# EAGLE board 2relay_2copy (EAGLE 6.6.0)
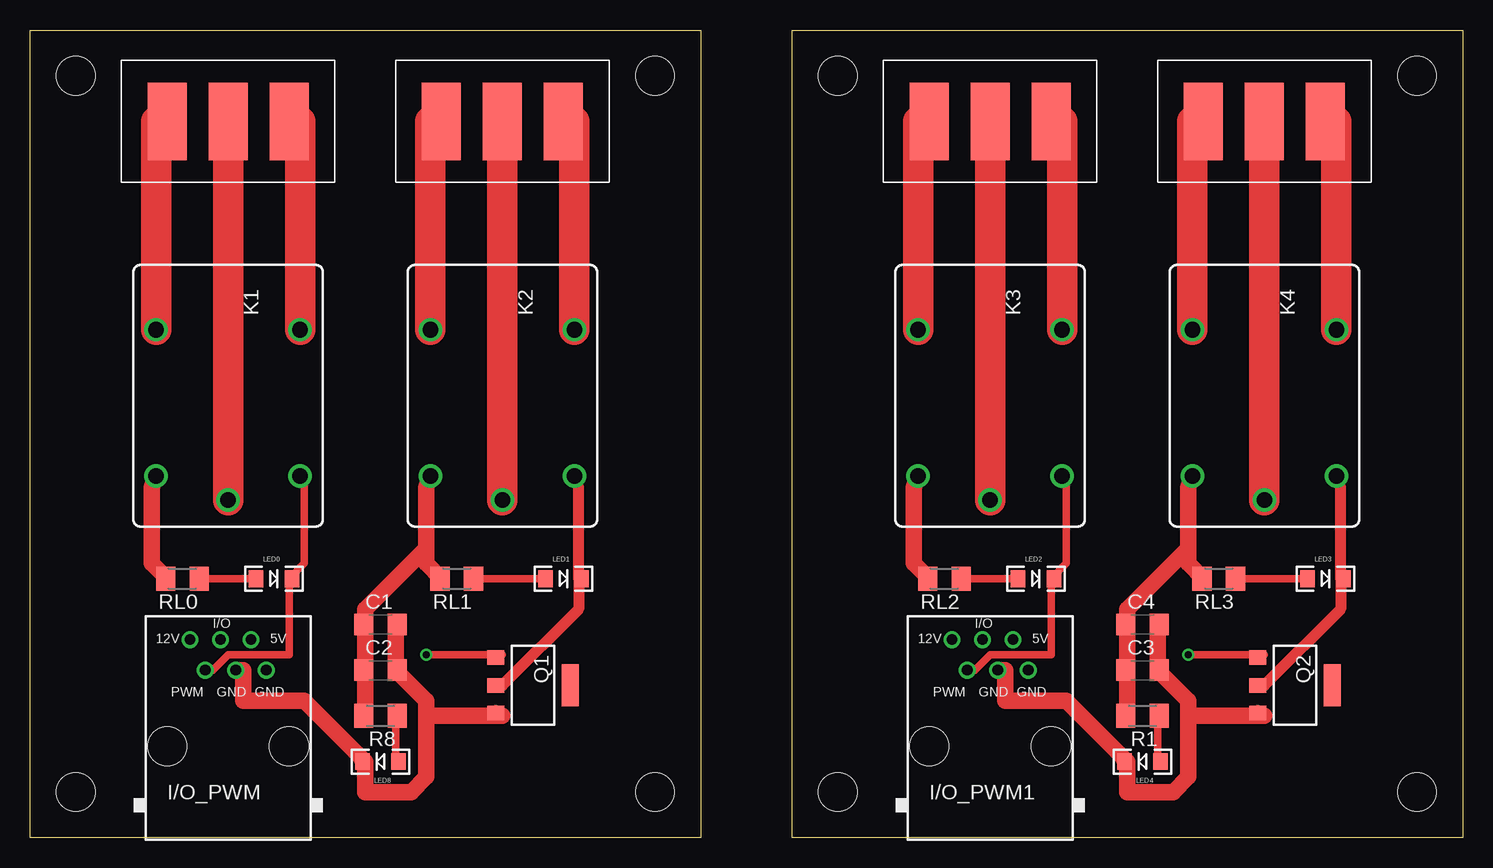
[diagram p0: board, top side]
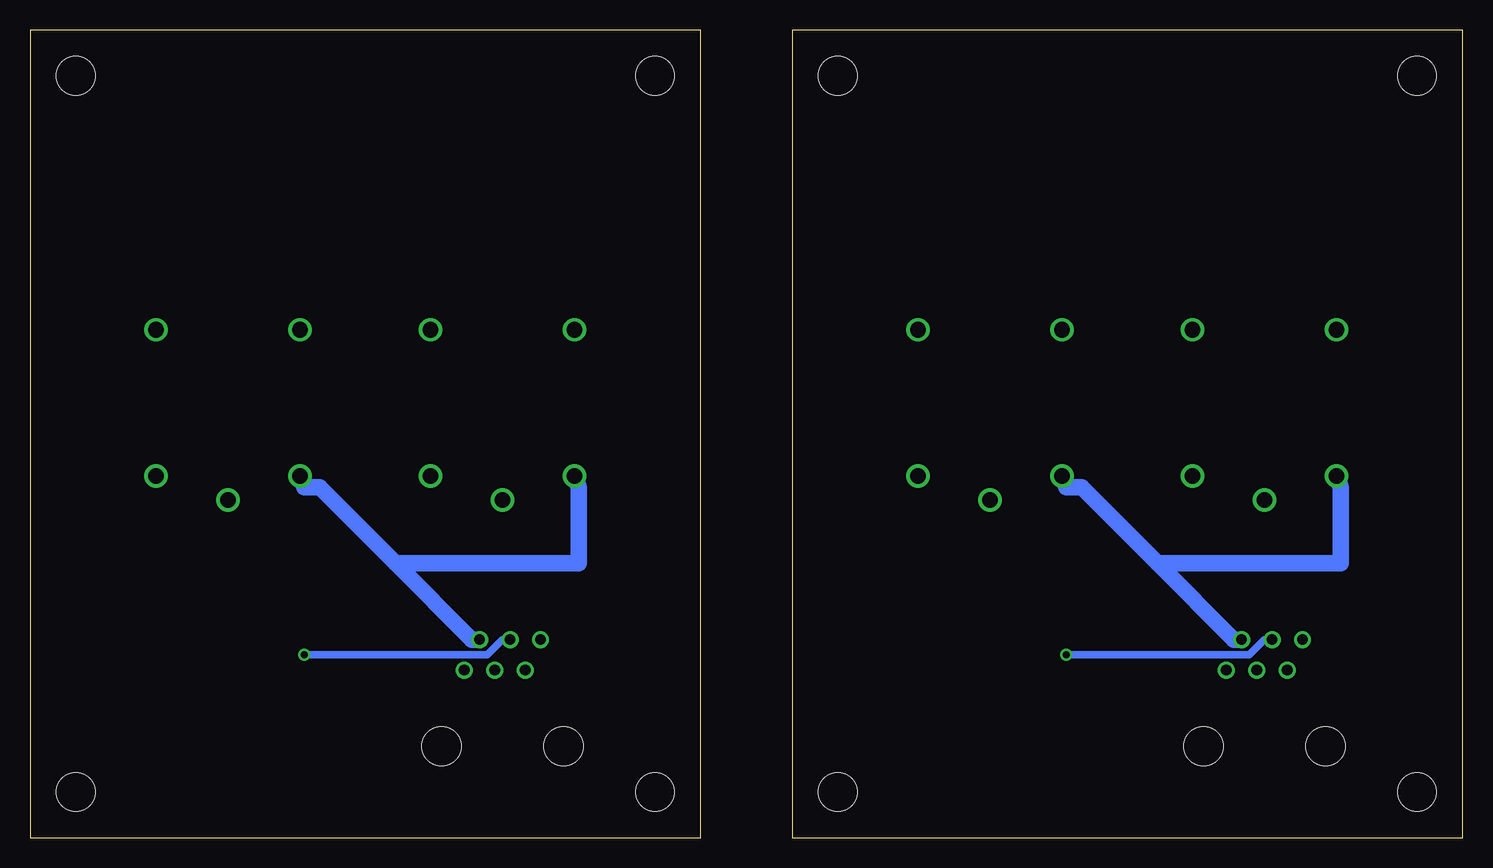
[diagram p1: board, bottom side, seen from below]

Size 119.38 x 67.31 mm. Coordinates in mm from the lower left corner, seen from the top.
Outline: 0,67.31 55.88,67.31 55.88,0 0,0 0,67.31
Outline: 63.5,67.31 119.38,67.31 119.38,0 63.5,0 63.5,67.31
Copper layers (1*16): Top 0.035mm / dielectric 1.5mm / Bottom 0.035mm
Design rules "default": minimum track width 10mil, minimum drill 24mil, track to track 8mil, track to pad 8mil, pad to pad 8mil, via to via 8mil, smd to smd 8mil, copper to edge 40mil, drill to drill 8mil, minimum pad ring 10mil, minimum via ring 8mil, stop-mask expansion 4mil, vias tented up to drill 0mil, thermal gap 10mil
Net classes: 0 default: width 0.61 mm; 1 power: width 0.914 mm; 2 highpower: width 1.372 mm
Holes 3.2 mm at 3.81,63.5 3.81,3.81 52.07,3.81 52.07,63.5 67.31,63.5 67.31,3.81 115.57,3.81 115.57,63.5
tRestrict: area 0,30.5 to 55.9,63.5; area 35.6,24.1 to 43.2,31.8; area 12.7,24.1 to 20.3,31.8; area 63.5,30.5 to 119.4,63.5; area 99.1,24.1 to 106.7,31.8; area 76.2,24.1 to 83.8,31.8
bRestrict: area 0,30.5 to 55.9,63.5; area 12.7,24.1 to 20.3,31.8; area 35.6,24.1 to 43.2,31.8; area 63.5,30.5 to 119.4,63.5; area 76.2,24.1 to 83.8,31.8; area 99.1,24.1 to 106.7,31.8
Milling: 8 lines

## Footprints (pad centres in the part's own frame; a part is rotated, then mirrored left to right if it is on the bottom)
C1206 = smd 1.6 x 1.8: 1 -1.4,0; 2 1.4,0
RJ12-STRAIGHT = drill 0.9 pad 1.4: +5V 1.905,8.89; +12V -3.175,8.89; GND1 3.175,6.35; GND2 0.635,6.35; I/O -0.635,8.89; PWM -1.905,6.35 | hole 3.251: -5.08,0; 5.08,0
JS-M = drill 1.3: 1 6.7,6; 2 6.7,-6; C 8.7,0; NC -5.5,-6; NO -5.5,6
LED-1206 = smd 1.2 x 1.4: A -1.5,0; C 1.5,0
PG-SOT-223 = smd 1.2 x 1.4: 1 -2.311,-3.099; 2 0,-3.099; 3 2.311,-3.099 | smd 3.5 x 1.4: 4 0,3.099
M1206 = smd 1.6 x 2: 1 -1.4,0; 2 1.4,0
3-PIN-5.08S = smd 3.251 x 6.452: 1 -5.08,0; 2 0,0; 3 5.08,0

## Placement (x,y rotation side)
C1  10uF  [C1206]  29.21,17.78 0 top
C2  100nF  [C1206]  29.21,13.97 0 top
C3  100nF  [C1206]  92.71,13.97 0 top
C4  10uF  [C1206]  92.71,17.78 0 top
I/O_PWM  I2C 1  [RJ12-STRAIGHT]  16.51,7.62 0 top
I/O_PWM1  I2C 1  [RJ12-STRAIGHT]  80.01,7.62 0 top
K1  JS-M1-9V-5  [JS-M]  16.51,36.83 270 top
K2  JS-M1-9V-5  [JS-M]  39.37,36.83 270 top
K3  JS-M1-9V-5  [JS-M]  80.01,36.83 270 top
K4  JS-M1-9V-5  [JS-M]  102.87,36.83 270 top
LED0  [LED-1206]  20.32,21.59 0 top
LED1  [LED-1206]  44.45,21.59 0 top
LED2  [LED-1206]  83.82,21.59 0 top
LED3  [LED-1206]  107.95,21.59 0 top
LED4  [LED-1206]  92.71,6.35 180 top
LED8  [LED-1206]  29.21,6.35 180 top
Q1  BSP75  [PG-SOT-223]  41.91,12.7 270 top
Q2  BSP75  [PG-SOT-223]  105.41,12.7 270 top
R1  1K  [M1206]  92.71,10.16 180 top
R8  1K  [M1206]  29.21,10.16 180 top
RL0  1K  [M1206]  12.7,21.59 180 top
RL1  1K  [M1206]  35.56,21.59 180 top
RL2  1K  [M1206]  76.2,21.59 180 top
RL3  1K  [M1206]  99.06,21.59 180 top
X1  22-23-20315.08S  [3-PIN-5.08S]  39.37,59.69 180 top
X2  22-23-20315.08S  [3-PIN-5.08S]  16.51,59.69 180 top
X3  22-23-20315.08S  [3-PIN-5.08S]  102.87,59.69 180 top
X4  22-23-20315.08S  [3-PIN-5.08S]  80.01,59.69 180 top

## Library data of the parts
C1-C4 = rcl
I/O_PWM I/O_PWM1 X1-X4 = lpatiny
K1-K4 = relay; OC_FARNELL: unknown; OC_NEWARK: unknown
LED0 LED1-LED4 LED8 = SparkFun
Q1 Q2 = infineon; OC_FARNELL: unknown; OC_NEWARK: unknown
R1 R8 RL0 RL1-RL3 = resistor

## Nets
+5V [highpower]: C1.1 C2.1 I/O_PWM.+5V K1.2 K2.2 R8.2 RL0.2 RL1.2
+5V1 [highpower]: C3.1 C4.1 I/O_PWM1.+5V K3.2 K4.2 R1.2 RL2.2 RL3.2
GND [highpower]: C1.2 C2.2 I/O_PWM.GND2 LED8.C Q1.3
GND1 [highpower]: C3.2 C4.2 I/O_PWM1.GND2 LED4.C Q2.3
I/O: I/O_PWM.I/O Q1.1
I/O1: I/O_PWM1.I/O Q2.1
N$1 [power]: K2.1 LED1.C Q1.2
N$2: LED0.A RL0.1
N$3 [power]: K4.1 LED3.C Q2.2
N$4: LED1.A RL1.1
N$5 [highpower]: K2.C X1.2
N$6 [highpower]: K1.NC X2.3
N$7 [highpower]: K2.NC X1.3
N$8: LED2.A RL2.1
N$9: LED3.A RL3.1
N$10: LED4.A R1.1
N$11 [highpower]: K4.NO X3.1
N$12 [highpower]: K3.NO X4.1
N$13 [highpower]: K3.NC X4.3
N$14 [highpower]: K2.NO X1.1
N$15 [highpower]: K4.NC X3.3
N$16 [highpower]: K4.C X3.2
N$19 [highpower]: K1.NO X2.1
N$23: LED8.A R8.1
POWER1 [highpower]: K1.C X2.2
POWER2 [highpower]: K3.C X4.2
PWM: I/O_PWM.PWM K1.1 LED0.C
PWM1: I/O_PWM1.PWM K3.1 LED2.C

## Tracks (layer width: path | path; a pad name or v marks a point on that pad's centre or on a via)
+5V
  Top 1.372: RL0.2 11.43,21.59 10.16,22.86 10.16,29.21 K1.2 | 27.94,17.78 27.94,13.97 | 27.94,13.97 27.94,10.16 R8.2 | 27.94,13.97 C2.1 | 33.02,24.13 33.02,29.21 K2.2 | 33.02,24.13 33.02,22.86 34.29,21.59 RL1.2 | 27.94,17.78 27.94,19.05 33.02,24.13 | 27.94,17.78 C1.1
  Bottom 1.372: 25.4,22.86 31.75,29.21 33.02,29.21 K2.2 | 25.4,22.86 19.05,16.51 I/O_PWM.+5V | 25.4,22.86 10.16,22.86 10.16,29.21 K1.2
+5V1
  Top 1.372: RL2.2 74.93,21.59 73.66,22.86 73.66,29.21 K3.2 | 91.44,17.78 91.44,13.97 | 91.44,13.97 91.44,10.16 R1.2 | 91.44,13.97 C3.1 | 96.52,24.13 96.52,29.21 K4.2 | 96.52,24.13 96.52,22.86 97.79,21.59 RL3.2 | 91.44,17.78 91.44,19.05 96.52,24.13 | 91.44,17.78 C4.1
  Bottom 1.372: 88.9,22.86 95.25,29.21 96.52,29.21 K4.2 | 88.9,22.86 82.55,16.51 I/O_PWM1.+5V | 88.9,22.86 73.66,22.86 73.66,29.21 K3.2
GND
  Top 1.372: 33.02,10.16 39.37,10.16 Q1.3 | 33.02,10.16 33.02,11.43 30.48,13.97 | 30.48,13.97 30.48,17.78 C1.2 | 30.48,13.97 C2.2 | 27.94,6.35 22.86,11.43 17.78,11.43 17.78,13.97 I/O_PWM.GND2 | 33.02,10.16 33.02,5.08 31.75,3.81 27.94,3.81 27.94,6.35 | 27.94,6.35 LED8.C
GND1
  Top 1.372: 96.52,10.16 102.87,10.16 Q2.3 | 96.52,10.16 96.52,11.43 93.98,13.97 | 93.98,13.97 93.98,17.78 C4.2 | 93.98,13.97 C3.2 | 91.44,6.35 86.36,11.43 81.28,11.43 81.28,13.97 I/O_PWM1.GND2 | 96.52,10.16 96.52,5.08 95.25,3.81 91.44,3.81 91.44,6.35 | 91.44,6.35 LED4.C
I/O  (via drill 0.61)
  Top 0.61: v33.02,15.24 39.37,15.24 Q1.1
  Bottom 0.61: v33.02,15.24 17.78,15.24 16.51,16.51 I/O_PWM.I/O
I/O1  (via drill 0.61)
  Top 0.61: v96.52,15.24 102.87,15.24 Q2.1
  Bottom 0.61: v96.52,15.24 81.28,15.24 80.01,16.51 I/O_PWM1.I/O
N$1
  Top 0.914: 45.72,21.59 45.72,19.05 39.37,12.7 Q1.2 | 45.72,21.59 45.72,29.21 K2.1 | 45.72,21.59 LED1.C
N$2
  Top 0.61: 19.05,21.59 LED0.A RL0.1 13.97,21.59
N$3
  Top 0.914: 109.22,21.59 109.22,19.05 102.87,12.7 Q2.2 | 109.22,21.59 109.22,29.21 K4.1 | 109.22,21.59 LED3.C
N$4
  Top 0.61: 43.18,21.59 LED1.A RL1.1 36.83,21.59
N$5
  Top 2.54: X1.2 K2.C
N$6
  Top 2.54: X2.3 10.51,59.69 K1.NC
N$7
  Top 2.54: X1.3 33.37,59.69 K2.NC
N$8
  Top 0.61: 82.55,21.59 LED2.A RL2.1 77.47,21.59
N$9
  Top 0.61: 106.68,21.59 LED3.A RL3.1 100.33,21.59
N$10
  Top 0.61: LED4.A 93.98,6.35 93.98,10.16 R1.1
N$11
  Top 2.54: X3.1 108.87,59.69 K4.NO
N$12
  Top 2.54: X4.1 86.01,59.69 K3.NO
N$13
  Top 2.54: X4.3 74.01,59.69 K3.NC
N$14
  Top 2.54: X1.1 45.37,59.69 K2.NO
N$15
  Top 2.54: X3.3 96.87,59.69 K4.NC
N$16
  Top 2.54: X3.2 K4.C
N$19
  Top 2.54: X2.1 22.51,59.69 K1.NO
N$23
  Top 0.61: LED8.A 30.48,6.35 30.48,10.16 R8.1
POWER1
  Top 2.54: X2.2 K1.C
POWER2
  Top 2.54: X4.2 K3.C
PWM
  Top 0.61: 21.59,21.59 22.86,22.86 22.86,29.21 K1.1 | 21.59,21.59 21.59,15.24 16.51,15.24 15.24,13.97 I/O_PWM.PWM | 21.59,21.59 LED0.C
PWM1
  Top 0.61: 85.09,21.59 86.36,22.86 86.36,29.21 K3.1 | 85.09,21.59 85.09,15.24 80.01,15.24 78.74,13.97 I/O_PWM1.PWM | 85.09,21.59 LED2.C